# Altium PCB Tfinal.PcbDoc (part 1 of 3)
Units mm, origin at the board's own origin, x right, y up, seen from the top; angles counter-clockwise.
Board outline 152.4 x 101.6 mm, 2 copper layers (Top Layer, Bottom Layer); 134 components, 112 nets, 404 pads, 12 vias.
Unrouted connection lines stored in the file: 100.
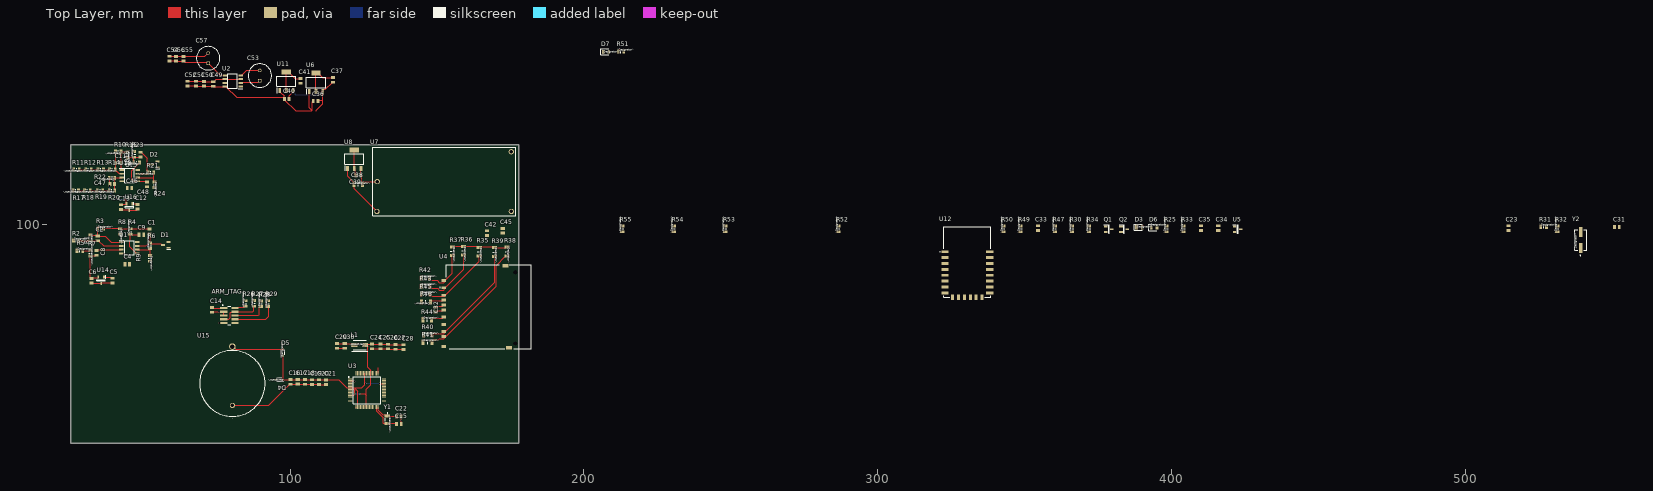
[diagram p0: Top Layer view]
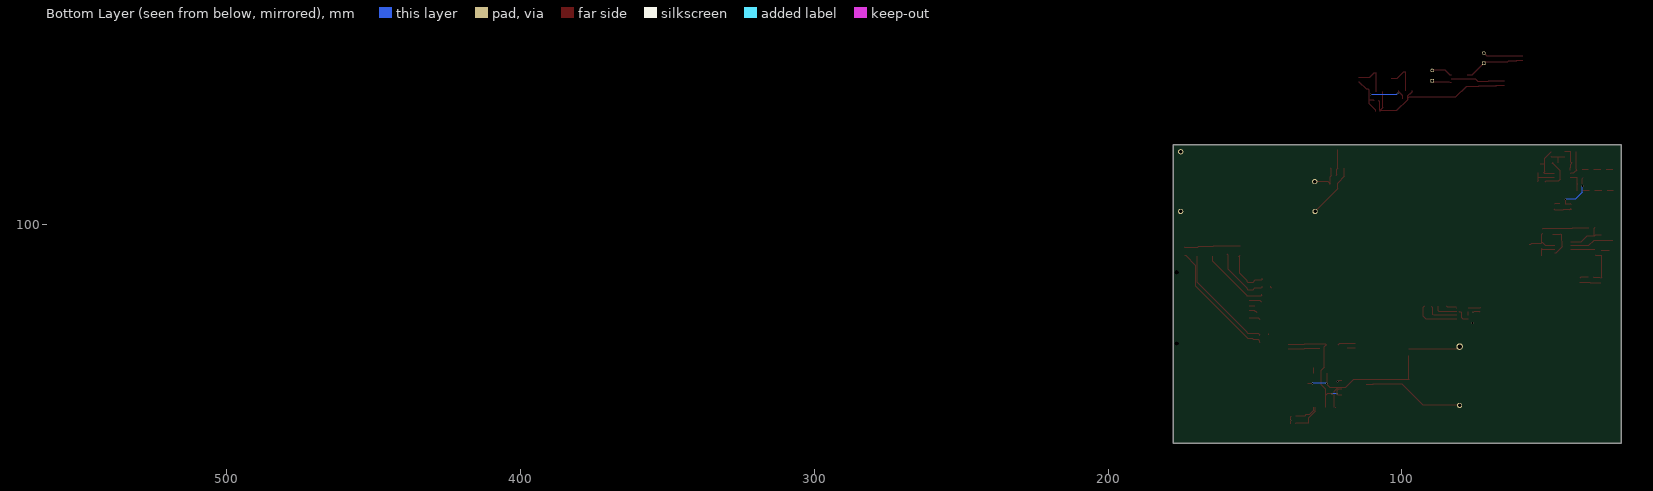
[diagram p1: Bottom Layer view, seen from below]

## Layer stack, top to bottom
Top Solder: solder mask 0.0102, Solder Resist, Dk 3.5
Top Layer: signal copper 0.0356
Dielectric 1: dielectric 0.32, FR-4, Dk 4.8
Bottom Layer: signal copper 0.0356
Bottom Solder: solder mask 0.0102, Solder Resist, Dk 3.5

## Board outline
25.4,25.4 177.8,25.4 177.8,127 25.4,127

## Design rules (kind name [scope] priority, off if disabled: settings)
Clearance [All] p1: gap=0.254 ignorepadtopadclearanceinfootprint=FALSE except(0: Arc-Hole Track-Hole SMDPad-Hole THPad-Hole Via-Hole Fill-Hole Poly-Hole Region-Hole Text-Hole)
PolygonConnect [All] p1: connectstyle=Relief reliefconductorwidth=0.254 reliefentries=4 polygonreliefangle="90 Angle" airgapwidth=0.254
RoutingVias [All] p1: holewidth=0.711 width=1.27 viastyle="Through Hole" minholewidth=0.711 minwidth=1.27 maxholewidth=0.711 maxwidth=1.27
SolderMaskExpansion [All] p1: expansion=0.102
Width [All] p1: maxlimit=0.254 minlimit=0.254 preferedwidth=0.254
30 further rules are at their usual default settings.

## Classes and differential pairs
component class adc_chanels.b: C1 C2 C4 C5 C6 C8 C9 C10 C11 C12 C13 C46 C47 C48 D1 D2 H3 R1 R2 R3 R4 R5 R6 R7 R8 R9 R10 R11 R12 R13 R14 R15 R16 R17 R18 R19 R20 R21 R22 R23 R24 U1 U13 U14 U16
component class supply: C36 C37 C38 C39 C40 C41 C49 C50 C51 C52 C53 C54 C55 C56 C57 D7 R51 U2 U6 U7 U8 U10 U11
component class arm: * ARM_JTAG C14 C15 C16 C17 C18 C19 C20 C21 C22 C23 C24 C25 C26 C27 C28 C29 C30 C31 C32 C33 C34 C35 C42 C45 D3 D4 D5 D6 H1 H2 L1 Q1 Q2 R25 R26 R27 R28 R29 R30 R31 R32 R33 R34 R35 R36 R37 R38 R39 R40 R41 R42 R43 R44 R45 R46 R47 R49 R50 R52 R53 R54 R55 U3 U4 U5 U12 U15 Y1 Y2

## Components (designator, comment, footprint, x,y, rotation, side; value= is the part's Value field where it differs from the comment)
ARM_JTAG "20021121-00010C4LF" "conector jtag ok" 79.395,68.885 r270 top
C1 "CAP_GRM2195C1H103FA01D_MURATA" "CAP smd 0805 ok" 49.606,97.356 r270 top
C2 "CAP_GRM2195C1H103FA01D_MURATA" "CAP smd 0805 ok" 31.953,94.999 r270 top
C4 "CAP_CC0805KRX7R8BB104_YAGEO" "CAP smd 0805 ok" 44.727,83.693 r0 top
C5 "CAP_CC0805KKX7R7BB105_YAGEO" "CAP smd 0805 ok" 42.189,80.902 r90 top
C6 "CAP_CC0805KKX7R7BB105_YAGEO" "CAP smd 0805 ok" 35.077,80.846 r90 top
C8 "CAP_GRM2195C1H103FA01D_MURATA" "CAP smd 0805 ok" 31.496,90.066 r270 top
C9 "CAP_GRM2195C1H103FA01D_MURATA" "CAP smd 0805 ok" 49.299,99.009 r180 top
C10 "CAP_GRM2195C1H103FA01D_MURATA" "CAP smd 0805 ok" 51.816,123.746 r90 top
C11 "CAP_GRM2195C1H103FA01D_MURATA" "CAP smd 0805 ok" 41.374,123.419 r180 top
C12 "CAP_CC0805KKX7R7BB105_YAGEO" "CAP smd 0805 ok" 50.775,106.017 r90 top
C13 "CAP_CC0805KKX7R7BB105_YAGEO" "CAP smd 0805 ok" 45.11,105.895 r90 top
C14 "CAP_CC0805KRX7R8BB104_YAGEO" "CAP smd 0805 ok" 70.79,70.66 r270 top
C15 "CAP_C0805X150J5GACTU_KEMET" "CAP smd 0805 ok" 137.183,29.388 r0 top
C16 "CAP_CL21A106KOCL3RC" "CAP smd 0805 ok" 97.561,46.169 r270 top
C17 "CAP_CL21A106KOCL3RC" "CAP smd 0805 ok" 99.974,46.189 r270 top
C18 "CAP_CC0805KRX7R8BB104_YAGEO" "CAP smd 0805 ok" 102.387,46.164 r270 top
C19 "CAP_CC0805KRX7R8BB104_YAGEO" "CAP smd 0805 ok" 104.8,46.087 r270 top
C20 "CAP_CC0805KRX7R8BB104_YAGEO" "CAP smd 0805 ok" 107.239,46.087 r270 top
C21 "CAP_CC0805KRX7R8BB104_YAGEO" "CAP smd 0805 ok" 109.55,46.037 r270 top
C22 "CAP_C0805X150J5GACTU_KEMET" "CAP smd 0805 ok" 137.112,31.928 r0 top
C23 "CAP_C0805X150J5GACTU_KEMET" "CAP smd 0805 ok" 517.121,98.755 r90 top
C24 "CAP_CL21A106KOCL3RC" "CAP smd 0805 ok" 125.298,58.234 r270 top
C25 "CAP_CC0805KRX7R8BB104_YAGEO" "CAP smd 0805 ok" 128.092,58.259 r270 top
C26 "CAP_CC0805KRX7R8BB104_YAGEO" "CAP smd 0805 ok" 130.658,58.208 r270 top
C27 "CAP_CC0805KRX7R8BB104_YAGEO" "CAP smd 0805 ok" 133.274,58.081 r270 top
C28 "CAP_CC0805KRX7R8BB104_YAGEO" "CAP smd 0805 ok" 135.992,58.005 r270 top
C29 "CAP_CC0805KRX7R8BB104_YAGEO" "CAP smd 0805 ok" 113.284,58.423 r270 top
C30 "CAP_CC0805KRX7R8BB104_YAGEO" "CAP smd 0805 ok" 115.976,58.392 r270 top
C31 "CAP_C0805X150J5GACTU_KEMET" "CAP smd 0805 ok" 551.538,96.342 r0 top
C32 "CAP_CC0805KRX7R8BB104_YAGEO" "CAP smd 0805 ok" 152.222,71.03 r90 top
C33 "CAP_CC0805KRX7R8BB104_YAGEO" "CAP smd 0805 ok" 357.101,98.755 r90 top
C34 "CAP_CC0805KKX7R7BB105_YAGEO" "CAP smd 0805 ok" 418.442,98.755 r90 top
C35 "CAP_CC0805KKX7R7BB105_YAGEO" "CAP smd 0805 ok" 412.6,98.755 r90 top
C36 "CAP_CL21A106KOCL3RC" "CAP smd 0805 ok" 108.557,144.551 r180 top
C37 "CAP_CL21A106KOCL3RC" "CAP smd 0805 ok" 112.039,148.918 r270 top
C38 "CAP_CL21A106KOCL3RC" "CAP smd 0805 ok" 123.416,113.843 r0 top
C39 "CAP_CL31A106MBHNNNE" "cap smd 1206 ok" 123.426,118.491 r0 top
C40 "CAP_CL21A106KOCL3RC" "CAP smd 0805 ok" 99.007,139.929 r0 top
C41 "CAP_CL21A106KOCL3RC" "CAP smd 0805 ok" 100.99,148.587 r270 top
C42 "CAP_CL21A106KOCL3RC" "CAP smd 0805 ok" 169.672,97.051 r90 top
C45 "CAP_CC0805KRX7R8BB104_YAGEO" "CAP smd 0805 ok" 175.006,97.869 r90 top
C46 "CAP_CC0805KRX7R8BB104_YAGEO" "CAP smd 0805 ok" 45.265,114.884 r180 top
C47 "CAP_GRM2195C1H103FA01D_MURATA" "CAP smd 0805 ok" 39.652,111.023 r0 top
C48 "CAP_GRM2195C1H103FA01D_MURATA" "CAP smd 0805 ok" 54.051,113.586 r90 top
C49 "CAP_CC0805KRX7R8BB104_YAGEO" "CAP smd 0805 ok" 76.53,147.775 r90 top
C50 "CAP_CC0805KRX7R8BB104_YAGEO" "CAP smd 0805 ok" 73.355,147.851 r90 top
C51 "CAP_CC0805KRX7R8BB104_YAGEO" "CAP smd 0805 ok" 70.663,147.932 r90 top
C52 "CAP_CC0805KRX7R8BB104_YAGEO" "CAP smd 0805 ok" 67.767,147.902 r90 top
C53 "CAP_ESY107M050AG3AA_KEMET" "cap elec 8x11.5 ok" 89.84,150.571 r90 top
C54 "CAP_CC0805KRX7R8BB104_YAGEO" "CAP smd 0805 ok" 61.62,156.436 r90 top
C55 "CAP_CC0805KRX7R8BB104_YAGEO" "CAP smd 0805 ok" 66.446,156.365 r90 top
C56 "CAP_CC0805KRX7R8BB104_YAGEO" "CAP smd 0805 ok" 63.779,156.385 r90 top
C57 "CAP_ESY107M050AG3AA_KEMET" "cap elec 8x11.5 ok" 72.263,156.489 r90 top
D1 "BAS40-04-TP" "diode shockit ok" 57.575,92.908 r180 top
D2 "BAS40-04-TP" "diode shockit ok" 53.823,120.32 r180 top
D3 "150080RS75000" "Diode smd 0805 red ok" 388.851,101.295 r0 top
D4 "DB2J20900L" "Diode SMini2 ok" 96.393,46.914 r180 top
D5 "DB2J20900L" "Diode SMini2 ok" 97.513,56.22 r90 top
D6 "150080VS75000" "Diode smd 0805 green ok" 393.931,101.168 r0 top
D7 "150080YS75000" "Diode smd 0805 yellow ok" 207.359,160.985 r0 top
L1 "CM453232-100KL" "Inductor smd 1812 ok" 123.804,54.762 r180 top
Q1 "MMBT2222ALT1G" "transistor led ok" 378.564,98.247 r0 top
Q2 "MMBT2222ALT1G" "transistor led ok" 383.771,98.247 r0 top
R1 "RC0805FR-074K7L" "res 0805 ok" 34.392,95.26 r270 top
R2 "RC0805FR-073K16L" "res 0805 ok" 27.32,96.545 r0 top
R3 "RC0805FR-079K31L" "res 0805 ok" 35.575,100.736 r0 top
R4 "RC0805FR-074K7L" "res 0805 ok" 43.434,97.47 r90 top
R5 "RC0805FR-073K16L" "res 0805 ok" 28.534,93.142 r0 top
R6 "RC0805FR-0710KL" "res 0805 ok" 50.165,92.644 r90 top
R7 "RC0805FR-074K7L" "res 0805 ok" 34.29,90.084 r270 top
R8 "RC0805FR-079K31L" "res 0805 ok" 44.425,97.419 r270 top
R9 "RC0805FR-0710KL" "res 0805 ok" 54.585,88.28 r270 top
R10 "RC0805FR-074K7L" "res 0805 ok" 41.57,122.377 r180 top
R11 "RC0805FR-07412KL" "res 0805 ok" 27.346,116.281 r180 top
R12 "RC0805FR-07412KL" "res 0805 ok" 31.405,116.281 r180 top
R13 "RC0805FR-07412KL" "res 0805 ok" 35.596,116.281 r180 top
R14 "RC0805FR-0715K8L" "res 0805 ok" 39.533,116.281 r180 top
R15 "RC0805FR-079K31L" "res 0805 ok" 46.888,123.607 r270 top
R16 "RC0805FR-074K7L" "res 0805 ok" 47.793,118.694 r180 top
R17 "RC0805FR-07412KL" "res 0805 ok" 27.087,109.169 r180 top
R18 "RC0805FR-07412KL" "res 0805 ok" 31.029,109.169 r180 top
R19 "RC0805FR-07412KL" "res 0805 ok" 35.342,109.169 r180 top
R20 "RC0805FR-0715K8L" "res 0805 ok" 39.406,109.169 r180 top
R21 "RC0805FR-0710KL" "res 0805 ok" 52.639,115.265 r180 top
R22 "RC0805FR-074K7L" "res 0805 ok" 39.411,113.487 r180 top
R23 "RC0805FR-079K31L" "res 0805 ok" 44.704,123.713 r90 top
R24 "RC0805FR-0710KL" "res 0805 ok" 56.159,113.375 r270 top
R25 "RC0805FR-07130RL" "res 0805 ok" 395.963,98.374 r90 top
R26 "AC0805JR-07100KL" "res 0805 ok" 82.55,72.989 r90 top
R27 "AC0805JR-07100KL" "res 0805 ok" 85.471,73.015 r90 top
R28 "AC0805JR-07100KL" "res 0805 ok" 87.833,72.888 r90 top
R29 "AC0805JR-07100KL" "res 0805 ok" 90.221,72.964 r90 top
R30 "RC0805JR-0710KL" "res 0805 ok" 363.832,98.374 r90 top
R31 "RC0805JR-0710KL" "res 0805 ok" 526.519,101.295 r0 top
R32 "RC0805JR-0710KL" "res 0805 ok" 528.932,98.374 r90 top
R33 "RC0805FR-07130RL" "res 0805 ok" 401.805,98.374 r90 top
R34 "RC0805JR-0710KL" "res 0805 ok" 369.674,98.374 r90 top
R35 "RC1206JR-0768KL" "Res 1206 ok" 167.157,90.476 r270 top
R36 "RC1206JR-0768KL" "Res 1206 ok" 161.823,90.846 r270 top
R37 "RC1206JR-0768KL" "Res 1206 ok" 158.022,90.682 r270 top
R38 "RC1206JR-0768KL" "Res 1206 ok" 176.606,90.564 r270 top
R39 "RC1206JR-0768KL" "Res 1206 ok" 172.39,90.386 r270 top
R40 "RC1206JR-07100RL" "Res 1206 ok" 146.94,65.064 r0 top
R41 "RC1206JR-07100RL" "Res 1206 ok" 146.89,62.575 r0 top
R42 "RC1206JR-07100RL" "Res 1206 ok" 146.099,84.368 r0 top
R43 "RC1206JR-07100RL" "Res 1206 ok" 146.176,81.625 r0 top
R44 "RC1206JR-07100RL" "Res 1206 ok" 146.76,70.195 r0 top
R45 "RC1206JR-07100RL" "Res 1206 ok" 146.226,78.907 r0 top
R46 "RC1206JR-07100RL" "Res 1206 ok" 146.178,70.677 r180 top
R47 "AC0805JR-07100KL" "res 0805 ok" 357.99,98.374 r90 top
R49 "RC0805JR-0722RL" "res 0805 ok" 346.306,98.374 r90 top
R50 "RC0805JR-0722RL" "res 0805 ok" 340.464,98.374 r90 top
R51 "RC0805FR-07130RL" "res 0805 ok" 212.608,160.884 r0 top
R52 "RC0805JR-0710KL" "res 0805 ok" 284.33,98.374 r90 top
R53 "RC0805JR-0710KL" "res 0805 ok" 245.849,98.374 r90 top
R54 "RC0805JR-0710KL" "res 0805 ok" 228.323,98.374 r90 top
R55 "RC0805JR-0710KL" "res 0805 ok" 210.797,98.374 r90 top
U1 "TLV2472CDR" "tlv2472 ok" 40.392,90.018 r0 top
U2 "LM2660MX/NOPB" "LM2660MX/NOPB ok" 80.467,148.666 r180 top
U3 "ATSAM4S8BA-AU" "arm ok" 126.236,43.478 r0 top
U4 "10067847-001RLF" "conector sd ok" 166.954,71.846 r90 top
U5 "ISL21010CFH330Z-TK" "3v reference ok" 422.252,98.12 r0 top
U6 "LM1117MP-3.3" "LM1117MP-3.3 ok" 108.821,148.198 r90 top
U7 "VOF-10B-S12" "CONV_VOF-10B-S12 ok" 152.434,114.441 r180 top
U8 "" "LM1117MP-5.0/NOPB ok" 121.742,122.987 r90 top
U11 "LM1117MP-3.3" "LM1117MP-3.3 ok" 98.781,148.565 r90 top
U12 "esp8266 12f" "modulo wifi ok" 330.431,87.071 r0 top
U13 "TLV2472CDR" "tlv2472 ok" 40.468,114.554 r0 top
U14 "ISL21080CIH315Z-TK" "iso 1.5v ok" 35.738,80.874 r270 top
U15 "BS-7" "pila ok" 80.391,45.669 r90 top
U16 "ISL21080CIH315Z-TK" "iso 1.5v ok" 45.339,105.791 r270 top
Y1 "ECS-.327-12.5-34S-TR" "clk 32k ok" 129.845,33.421 r270 top
Y2 "ECS-120-20-3X-TR" "clk 12M ok" 533.25,94.056 r90 top

## Footprints (in the part's own frame and the unit in brackets; to place one, negate y for a bottom-side part, rotate by r counter-clockwise, add the part's x,y. Pads: shape width x height; smd on the part's side, far side on the other; paste and mask are expansions set on the pad)
"3v reference ok" [mm]
  rect 1.1x0.6 smd: 1(-0.973,1.077) 2(-0.973,-0.823) 3(1.227,0.127)
  silkscreen extent -1.52,-1.33 0.33,1.63, body extent -1.06,-1.33 1.31,1.59, height 0.94
"arm ok" [mm]
  rect 1.475x0.3 smd: 1(-5.738,3.75) 2(-5.738,3.25) 3(-5.738,2.75) 4(-5.738,2.25) 5(-5.738,1.75) 6(-5.738,1.25) 7(-5.738,0.75) 8(-5.738,0.25) 9(-5.738,-0.25) 10(-5.738,-0.75) 11(-5.738,-1.25) 12(-5.738,-1.75) 13(-5.738,-2.25) 14(-5.738,-2.75) 15(-5.738,-3.25) 16(-5.738,-3.75) 33(5.738,-3.75) 34(5.738,-3.25) 35(5.738,-2.75) 36(5.738,-2.25) 37(5.738,-1.75) 38(5.738,-1.25) 39(5.738,-0.75) 40(5.738,-0.25) 41(5.738,0.25) 42(5.738,0.75) 43(5.738,1.25) 44(5.738,1.75) 45(5.738,2.25) 46(5.738,2.75) 47(5.738,3.25) 48(5.738,3.75)
  rect 0.3x1.475 smd: 17(-3.75,-5.738) 18(-3.25,-5.738) 19(-2.75,-5.738) 20(-2.25,-5.738) 21(-1.75,-5.738) 22(-1.25,-5.738) 23(-0.75,-5.738) 24(-0.25,-5.738) 25(0.25,-5.738) 26(0.75,-5.738) 27(1.25,-5.738) 28(1.75,-5.738) 29(2.25,-5.738) 30(2.75,-5.738) 31(3.25,-5.738) 32(3.75,-5.738) 49(3.75,5.738) 50(3.25,5.738) 51(2.75,5.738) 52(2.25,5.738) 53(1.75,5.738) 54(1.25,5.738) 55(0.75,5.738) 56(0.25,5.738) 57(-0.25,5.738) 58(-0.75,5.738) 59(-1.25,5.738) 60(-1.75,5.738) 61(-2.25,5.738) 62(-2.75,5.738) 63(-3.25,5.738) 64(-3.75,5.738)
  silkscreen extent -6.35,-4.65 4.65,4.65, body extent -6,-6 6,6, height 1.6
"cap elec 8x11.5 ok" [mm]
  rect 1.2x1.2 hole 0.8: 1(-1.829,0.102)
  round 1.2 hole 0.8: 2(1.671,0.102)
  silkscreen extent -4.08,-3.9 3.92,4.1, body extent -4.33,-4.15 4.17,4.35, height 12.5
"CAP smd 0805 ok" [mm]
  rect 0.96x1.39 smd: 1(-0.917,2.642) 2(0.663,2.642)
  body extent -1.13,2.02 0.87,3.27, height 0.95
"cap smd 1206 ok" [mm]
  rect 1.05x1.82 smd: 1(-1.593,-4.928) 2(1.187,-4.928)
  silkscreen extent -0.2,-5.63 -0.2,-4.23, body extent -1.8,-5.73 1.4,-4.13, height 1.8
"clk 12M ok" [mm]
  rect 3.5x1.2 smd: 1(-2.231,-5.842) 2(3.269,-5.842)
  silkscreen extent -4.78,-7.89 4.02,-3.79, body extent -3.29,-7.78 4.31,-3.68, height 2.31
"clk 32k ok" [mm]
  rect 1.1x1.9 smd: 1(-1.25,3.302) 2(1.25,3.302)
  silkscreen extent -2.3,2.55 0.5,4.05, body extent -1.6,2.55 1.6,4.05, height 0.92
"conector jtag ok" [mm]
  rect 0.76x2.4 smd: 1(-2.54,-1.95) 2(-2.54,1.95) 3(-1.27,-1.95) 4(-1.27,1.95) 5(0,-1.95) 6(0,1.95) 7(1.27,-1.95) 8(1.27,1.95) 9(2.54,-1.95) 10(2.54,1.95)
  silkscreen extent -3.6,-2.4 3.17,0.5, body extent -3.2,-2.75 3.15,2.75, height 4.55
"conector sd ok" [mm]
  rect 1x1.5 smd: 1(6.475,14.652) 2(3.925,14.652) 3(0.675,14.652) 4(-1.025,14.652) 5(-3.525,14.652) 6(-6.025,14.652) 7(-8.45,14.652) 8(-10.15,14.652) 9(8.975,14.652) CD1(2.275,14.652) WP1(-13.5,14.652)
  rect 1.2x2.2 smd: G1(14,-6.348) G2(-14,-7.548)
  round 0.75 hole 1.5 unplated: MH1(-12.5,-9.648) MH2(11.7,-9.648)
  silkscreen extent -14.25,-15.15 14.25,16.03, body extent -14.23,-15 14.23,15.25, height 2.9
"CONV_VOF-10B-S12 ok" [mm]
  round 1.8 hole 1.2: 1(-22.86,10.16) 2(-22.86,-10.16) 3(22.86,10.16) 4(22.76,0)
  silkscreen extent -24.3,-11.65 24.3,11.65, body extent -24.38,-11.81 24.22,11.49, height 19.21
"diode shockit ok" [mm]
  rect 1.35x0.65 smd: 1(-1.15,0.985) 2(-1.15,-0.935) 3(0.85,0.025)
  silkscreen extent -1.83,1.56 -0.48,1.56, body extent -1.32,-1.43 1.08,1.47, height 1.01
"Diode smd 0805 green ok" [mm]
  rect 0.9x1.4 smd: 1(-0.9,-2.35) 2(1,-2.35)
  silkscreen extent -1.7,-3.4 1,-1.3, body extent -1,-2.95 1,-1.7, height 1.11
"Diode smd 0805 red ok" [mm]
  rect 0.9x1.4 smd: 1(-0.875,-2.4) 2(1.025,-2.4)
  silkscreen extent -1.67,-3.45 1.03,-1.35, body extent -0.95,-2.97 1.05,-1.73, height 1.11
"Diode smd 0805 yellow ok" [mm]
  rect 0.9x1.4 smd: 1(-0.85,-2.4) 2(1.05,-2.4)
  silkscreen extent -1.65,-3.45 1.05,-1.35
"Diode SMini2 ok" [mm]
  rect 0.99x0.47 smd: 1(-0.975,-0.15) 2(1.175,-0.15)
  silkscreen extent -1.47,-0.77 0.95,0.48, body extent -1.15,-0.77 1.35,0.48, height 0.8
"Inductor smd 1812 ok" [mm]
  rect 2.15x1.25 smd: 1(-1.723,-4.064) 2(1.977,-4.064)
  silkscreen extent -2.67,-5.66 2.79,-2.03, body extent -2.12,-5.66 2.38,-2.46, height 3.4
"iso 1.5v ok" [mm]
  rect 1.1x0.6 smd: 1(-1.1,0.95) 2(-1.1,-0.95) 3(1.1,0)
  silkscreen extent -1.65,-1.46 0.2,1.5, body extent -1.18,-1.46 1.18,1.46, height 1.12
"LM1117MP-3.3 ok" [mm]
  rect 1.75x0.95 smd: 1(-3.15,2.3) 2(-3.15,0) 3(-3.15,-2.3)
  rect 1.75x3.2 smd: 4(3.15,0)
  silkscreen extent -4.03,-3.25 1.75,3.25, body extent -3.5,-3.25 3.5,3.25, height 1.68
"LM1117MP-5.0/NOPB ok" [mm]
  rect 1.75x0.95 smd: 1(-4.039,2.173) 2(-4.039,-0.127) 3(-4.039,-2.427)
  rect 1.75x3.2 smd: 4(2.261,-0.127)
  silkscreen extent -4.91,-3.38 0.86,3.12, body extent -4.39,-3.38 2.61,3.12, height 1.68
"LM2660MX/NOPB ok" [mm]
  rect 1.528x0.65 smd: 1(-2.711,1.905) 2(-2.711,0.635) 3(-2.711,-0.635) 4(-2.711,-1.905) 5(2.711,-1.905) 6(2.711,-0.635) 7(2.711,0.635) 8(2.711,1.905)
  silkscreen extent -3.47,-2.45 1.6,2.58, body extent -3.01,-2.45 3.01,2.45, height 1.63
"modulo wifi ok" [mm]
  rect 2.5x1 smd: 1(-7.6,3.5) 2(-7.6,1.5) 3(-7.6,-0.5) 4(-7.6,-2.5) 5(-7.6,-4.5) 6(-7.6,-6.5) 7(-7.6,-8.5) 8(-7.6,-10.5) 15(7.6,-10.5) 16(7.6,-8.5) 17(7.6,-6.5) 18(7.6,-4.5) 19(7.6,-2.5) 20(7.6,-0.5) 21(7.6,1.5) 22(7.6,3.5)
  rect 1x1.8 smd: 9(-5,-12) 10(-3,-12) 11(-1,-12) 12(1,-12) 13(3,-12) 14(5,-12)
  silkscreen extent -9.4,-12 8,12, body extent -8,-12 8,12, height 3.1
"pila ok" [mm]
  round 1.755 hole 1.17: 1(-7.366,0)
  round 2.25 hole 1.5: 2(12.634,0)
  silkscreen extent -11.77,-11.17 11.27,11.17, body extent -11.08,-11.17 13.32,11.17, height 9.1
"res 0805 ok" [mm]
  rect 0.95x1.4 smd: 1(-0.975,-2.21) 2(0.925,-2.21)
  silkscreen extent -0.03,-2.73 -0.03,-1.68, body extent -1.03,-2.83 0.97,-1.58, height 0.6
"Res 1206 ok" [mm]
  rect 1x1.75 smd: 1(-1.576,-2.769) 2(1.424,-2.769)
  silkscreen extent -0.08,-3.47 -0.08,-2.07, body extent -1.63,-3.57 1.47,-1.97, height 0.65
"tlv2472 ok" [mm]
  rect 1.525x0.65 smd: 1(2.241,3.81) 2(2.241,2.54) 3(2.241,1.27) 4(2.241,0) 5(7.665,0) 6(7.665,1.27) 7(7.665,2.54) 8(7.665,3.81)
  silkscreen extent 1.48,-0.55 6.55,4.48, body extent 1.95,-0.55 7.95,4.36, height 1.75
"transistor led ok" [mm]
  rect 1.25x0.6 smd: 1(-1.05,0.955) 2(-1.05,-0.955) 3(1.05,0)
  silkscreen extent -1.68,-1.46 0.08,1.51, body extent -1.18,-1.46 1.18,1.46, height 1.11

## Part data
ARM_JTAG: "Conn Unshrouded Header HDR 10 POS 1.27mm Solder ST Top Entry SMD Minitek127® T/R", Manufacturer 1="Amphenol ICC / FCI", Supplier Part Number 1=609-3695-1-ND, ComponentLink1Description=https://datasheet.ciiva.com/11749/0900766b8118d62a-11749057.pdf?src-supplier=RSComponents, ComponentLink1URL=https://datasheet.ciiva.com/11749/0900766b8118d62a-11749057.pdf?src-supplier=RSComponents, Manufacturer Part Number 1=20021121-00010C4LF, Pricing 1="1=0,91000, 10=0,76900, 100=0,69070 (USD)", RoHS=No, Stock 1=0, Supplier 1=Digi-Key
C1 C2 C8 C9 C10 C11 C47 C48: "0805 10 nF 50 V ±1% Tolerance C0G SMD Multilayer Ceramic Capacitor", Capacitance=10nF, Case/Package=0805, Case Code (Metric)=2012, Dielectric=C0G, Manufacturer 1=Murata, Manufacturer Part Number 1=GRM2195C1H103FA01D, Max Operating Temperature=125°C, Min Operating Temperature=-55°C, Package Quantity=4000, Temperature Coefficient=30ppm/°C, Tolerance=1%, Voltage=50V, Case Code (Imperial)=0805, ComponentLink1Description=https://datasheet.ciiva.com/29542/partnumbering-e-01-29542571.pdf?src-supplier=Digi-Key, ComponentLink1URL=https://datasheet.ciiva.com/29542/partnumbering-e-01-29542571.pdf?src-supplier=Digi-Key, ComponentLink2Description=https://datasheet.ciiva.com/29542/partnumbering-e-01-29542569.pdf?src-supplier=Digi-Key, ComponentLink2URL=https://datasheet.ciiva.com/29542/partnumbering-e-01-29542569.pdf?src-supplier=Digi-Key, ComponentLink3Description=https://datasheet.ciiva.com/29542/partnumbering-e-01-29542570.pdf?src-supplier=Digi-Key, ComponentLink3URL=https://datasheet.ciiva.com/29542/partnumbering-e-01-29542570.pdf?src-supplier=Digi-Key, ComponentLink4Description=https://datasheet.ciiva.com/17452/c02e-17452856.pdf?src-supplier=Avnet+Europe, ComponentLink4URL=https://datasheet.ciiva.com/17452/c02e-17452856.pdf?src-supplier=Avnet+Europe, ComponentLink5Description=https://datasheet.ciiva.com/16497/c02e-16497047.pdf?src-supplier=Future+Electronics, ComponentLink5URL=https://datasheet.ciiva.com/16497/c02e-16497047.pdf?src-supplier=Future+Electronics, Construction=Flat, Depth=1.25mm, Height=0.85mm, Lead Free="Lead Free", Length=2mm, Mount="Surface Mount", Packaging="Tape and Reel", Pricing 1="1=0,54310 (USD)", Radiation Hardening=No, REACH SVHC="No SVHC", RoHS=Yes, RoHS Compliant=Yes, Series=GRM, Stock 1=3, Supplier 1="Arrow Electronics", Supplier Part Number 1=GRM2195C1H103FA01D, Termination=SMD/SMT, Thickness=0.037inch, Voltage Rating=50V, Voltage Rating (DC)=50V, Width=1.25mm
C4 C14 C18 C19 C20 C21 C25 C26 C27 C28 C29 C30 C32 C33 C45 C46 C49 C50 C51 C52 C54 C55 C56: "CAPACITOR, 0805, 100NF, 25V, REEL 4000", Capacitance=0.1uF, Case/Package=0805, Case Code (Metric)=2012, Dielectric=X7R, Insulation Resistance=100GR, Manufacturer 1=Yageo, Manufacturer Part Number 1=CC0805KRX7R8BB104, Max Operating Temperature=125°C, Min Operating Temperature=-55°C, Package Quantity=1, Resistor Type=Ceramic, Supplier Part Number 1=311-1141-1-ND, Tolerance=10%, Voltage Rating=25V, Case Code (Imperial)=0805, ComponentLink1Description=https://datasheet.ciiva.com/8034/70765-8034031.pdf?src-supplier=Element14, ComponentLink1URL=https://datasheet.ciiva.com/8034/70765-8034031.pdf?src-supplier=Element14, ComponentLink2Description=https://datasheet.ciiva.com/28450/1489800-28450789.pdf?src-supplier=Element14, ComponentLink2URL=https://datasheet.ciiva.com/28450/1489800-28450789.pdf?src-supplier=Element14, ComponentLink3Description=https://datasheet.ciiva.com/46430/1850775-46430166.pdf?src-supplier=Element14, ComponentLink3URL=https://datasheet.ciiva.com/46430/1850775-46430166.pdf?src-supplier=Element14, ComponentLink4Description=https://datasheet.ciiva.com/145/mlccorderingcode-145008.pdf?src-supplier=Digi-Key, ComponentLink4URL=https://datasheet.ciiva.com/145/mlccorderingcode-145008.pdf?src-supplier=Digi-Key, ComponentLink5Description=https://datasheet.ciiva.com/145/mlccorderingcode-145007.pdf?src-supplier=Digi-Key, ComponentLink5URL=https://datasheet.ciiva.com/145/mlccorderingcode-145007.pdf?src-supplier=Digi-Key, ComponentLink6Description=https://datasheet.ciiva.com/145/mlccorderingcode-145009.pdf?src-supplier=Digi-Key, ComponentLink6URL=https://datasheet.ciiva.com/145/mlccorderingcode-145009.pdf?src-supplier=Digi-Key, ComponentLink7Description=https://datasheet.ciiva.com/8034/1784427-8034030.pdf?src-supplier=Element14, ComponentLink7URL=https://datasheet.ciiva.com/8034/1784427-8034030.pdf?src-supplier=Element14, ComponentLink8Description=https://datasheet.ciiva.com/8034/1784427-8034029.pdf?src-supplier=Element14, ComponentLink8URL=https://datasheet.ciiva.com/8034/1784427-8034029.pdf?src-supplier=Element14, ComponentLink9Description=https://datasheet.ciiva.com/15189/getdatasheetpartid-330244-15189223.pdf?src-supplier=Verical, ComponentLink9URL=https://datasheet.ciiva.com/15189/getdatasheetpartid-330244-15189223.pdf?src-supplier=Verical, ComponentLink10Description=https://datasheet.ciiva.com/16625/upy-gphc-x7r-6-3v-to-50v-8-16625546.pdf?src-supplier=Avnet+Europe, ComponentLink10URL=https://datasheet.ciiva.com/16625/upy-gphc-x7r-6-3v-to-50v-8-16625546.pdf?src-supplier=Avnet+Europe, Depth=1.25mm, Halogen Free="Halogen Free", Height=0.85mm, Lead Free="Lead Free", Length=2mm, Material=Ceramic, Mount="Surface Mount", Number of Pins=2, Packaging="Tape and Reel", Pricing 1="1=0,12000, 10=0,08800, 50=0,04980, 100=0,04130, 500=0,02894, 1000=0,02396 (USD)", Radiation Hardening=No, REACH SVHC="No SVHC", RoHS=Yes, RoHS Compliant=Yes, Series=CC, Stock 1=278639, Supplier 1=Digi-Key, Termination=SMD/SMT, Thickness=0.033inch, Voltage Rating (DC)=25V, Width=0.049inch
C5 C6 C12 C13 C34 C35: "YAGEO   CC0805KKX7R7BB105   CERAMIC CAPACITOR, 1UF, 16V, X7R, 10%, 0805", Capacitance=1uF, Case/Package=0805, Case Code (Metric)=2012, Dielectric=X7R, Manufacturer 1=Yageo, Manufacturer Part Number 1=CC0805KKX7R7BB105, Max Operating Temperature=125°C, Min Operating Temperature=-55°C, Package Quantity=1, Supplier Part Number 1=311-1365-1-ND, Tolerance=10%, Voltage Rating=16V, Case Code (Imperial)=0805, ComponentLink1Description=https://datasheet.ciiva.com/144/mlccorderingcode-144902.pdf?src-supplier=Digi-Key, ComponentLink1URL=https://datasheet.ciiva.com/144/mlccorderingcode-144902.pdf?src-supplier=Digi-Key, ComponentLink2Description=https://datasheet.ciiva.com/144/mlccorderingcode-144903.pdf?src-supplier=Digi-Key, ComponentLink2URL=https://datasheet.ciiva.com/144/mlccorderingcode-144903.pdf?src-supplier=Digi-Key, ComponentLink3Description=https://datasheet.ciiva.com/144/mlccorderingcode-144904.pdf?src-supplier=Digi-Key, ComponentLink3URL=https://datasheet.ciiva.com/144/mlccorderingcode-144904.pdf?src-supplier=Digi-Key, ComponentLink4Description=https://datasheet.ciiva.com/11464/upy-gphc-x7r-6-3v-to-50v-8-11464750.pdf?src-supplier=Avnet, ComponentLink4URL=https://datasheet.ciiva.com/11464/upy-gphc-x7r-6-3v-to-50v-8-11464750.pdf?src-supplier=Avnet, ComponentLink5Description=https://datasheet.ciiva.com/13173/upy-gp-np0-16v-to-50v-8-3714-13173254.pdf?src-supplier=Mouser, ComponentLink5URL=https://datasheet.ciiva.com/13173/upy-gp-np0-16v-to-50v-8-3714-13173254.pdf?src-supplier=Mouser, ComponentLink6Description=https://datasheet.ciiva.com/7978/1489800-7978201.pdf?src-supplier=Element14, ComponentLink6URL=https://datasheet.ciiva.com/7978/1489800-7978201.pdf?src-supplier=Element14, ComponentLink7Description=https://datasheet.ciiva.com/28450/1489800-28450750.pdf?src-supplier=Element14, ComponentLink7URL=https://datasheet.ciiva.com/28450/1489800-28450750.pdf?src-supplier=Element14, ComponentLink8Description=https://datasheet.ciiva.com/15189/getdatasheetpartid-251802-15189206.pdf?src-supplier=Verical, ComponentLink8URL=https://datasheet.ciiva.com/15189/getdatasheetpartid-251802-15189206.pdf?src-supplier=Verical, Depth=1.25mm, Halogen Free="Halogen Free", Lead Free="Lead Free", Length=2mm, Mount="Surface Mount", Packaging="Tape and Reel", Pricing 1="1=0,16000, 10=0,11700, 50=0,06640, 100=0,05500, 500=0,03858, 1000=0,03194 (USD)", Radiation Hardening=No, REACH SVHC="No SVHC", RoHS=Yes, RoHS Compliant=Yes, Series=CC, Stock 1=516899, Supplier 1=Digi-Key, Termination=SMD/SMT, Thickness=0.049inch, Voltage Rating (DC)=16V, Width=0.049inch
C15 C22 C23 C31: "Multilayer Ceramic Capacitors MLCC - SMD/SMT 50volts 15pF 5% C0G", Capacitance=15pF, Case/Package=0805, Case Code (Metric)=2012, Dielectric=C0G, Dielectric Material=Ceramic, Manufacturer 1=KEMET, Manufacturer Part Number 1=C0805X150J5GACTU, Max Operating Temperature=125°C, Min Operating Temperature=-55°C, Package Quantity=4000, Supplier Part Number 1=399-7428-1-ND, Tolerance=5%, Voltage Rating=50V, Case Code (Imperial)=0805, ComponentLink1Description=http://www.mouser.com/ds/2/212/KEM_C1062_C0G_FT-CAP_SMD-1101746.pdf?src-supplier=Mouser, ComponentLink1URL=http://www.mouser.com/ds/2/212/KEM_C1062_C0G_FT-CAP_SMD-1101746.pdf?src-supplier=Mouser, ComponentLink2Description=http://www.kemet.com/kemet/web/homepage/kechome.nsf/file/KEM_C1062_C0G_FT-CAP_SMD.pdf/$file/KEM_C1062_C0G_FT-CAP_SMD.pdf?src-supplier=Avnet, ComponentLink2URL=http://www.kemet.com/kemet/web/homepage/kechome.nsf/file/KEM_C1062_C0G_FT-CAP_SMD.pdf/$file/KEM_C1062_C0G_FT-CAP_SMD.pdf?src-supplier=Avnet, ComponentLink3Description=https://search.kemet.com/component-edge/download/specsheet/C0805X150J5GACTU.pdf?src-supplier=Digi-Key, ComponentLink3URL=https://search.kemet.com/component-edge/download/specsheet/C0805X150J5GACTU.pdf?src-supplier=Digi-Key, Construction=Flat, Depth=1.25mm, Features="Soft Termination", Height=0.78mm, Lead Free="Lead Free", Length=0.083inch, Mount="Surface Mount", Packaging="Tape and Reel", Pricing 1="1=0,33000, 10=0,23100, 50=0,16160, 100=0,13860, 500=0,10396, 1000=0,08778 (USD)", Radiation Hardening=No, RoHS=Yes, RoHS Compliant=Yes, Series=FT-CAP, Stock 1=2348, Supplier 1=Digi-Key, Termination=SMD/SMT, Thickness=0.035inch, Voltage Rating (DC)=50V, Width=1.25mm
C16 C17 C24 C36 C37 C38 C40 C41 C42: "CAP CER 10UF 16V X5R 0805", Capacitance=10uF, Case/Package=0805, Case Code (Metric)=2012, Manufacturer 1=Samsung, Manufacturer Part Number 1=CL21A106KOCL3RC, Max Operating Temperature=85°C, Min Operating Temperature=-55°C, Package Quantity=1, Supplier Part Number 1=1276-2398-2-ND, Tolerance=10%, Voltage Rating=16V, Case Code (Imperial)=0805, ComponentLink1Description=https://datasheet.ciiva.com/25796/cl21a106kocl3rc-25796224.pdf?src-supplier=Digi-Key, ComponentLink1URL=https://datasheet.ciiva.com/25796/cl21a106kocl3rc-25796224.pdf?src-supplier=Digi-Key, Length=0.079inch, Mount="Surface Mount", Packaging="Tape and Reel", RoHS=Yes, RoHS Compliant=Yes, Series=CL, Stock 1=0, Supplier 1=Digi-Key, Thickness=0.037inch, Width=0.049inch
C39: "Cap Ceramic 10uF 50V X5R 20% Pad SMD 1206 85°C T/R", Capacitance=10uF, Case/Package=1206, Case Code (Metric)=3216, Dielectric=X5R, Manufacturer 1=Samsung, Manufacturer Part Number 1=CL31A106MBHNNNE, Max Operating Temperature=85°C, Min Operating Temperature=-55°C, Supplier Part Number 1=1276-6736-1-ND, Tolerance=20%, Voltage Rating=50V, Case Code (Imperial)=1206, ComponentLink1Description=http://www.samsungsem.com/kr/support/product-search/mlcc/CL31A106MBHNNNE.jsp?src-supplier=Digi-Key, ComponentLink1URL=http://www.samsungsem.com/kr/support/product-search/mlcc/CL31A106MBHNNNE.jsp?src-supplier=Digi-Key, Length=0.126inch, Mount="Surface Mount", Packaging="Tape and Reel", Pricing 1="1=0,31000, 10=0,21300, 50=0,14200, 100=0,12070, 500=0,08520, 1000=0,07455 (USD)", RoHS=Yes, RoHS Compliant=Yes, Stock 1=1423422, Supplier 1=Digi-Key, Thickness=0.071inch, Voltage Rating (DC)=50V, Width=0.063inch
C53 C57: "KEMET - ESY107M050AG3AA - Elektrolytkondensator, 100 µF, 50 V, Produktreihe ESY, ± 20%, Radial bedrahtet, 8 mm", Capacitance=100uF, Case/Package=Radial, Dielectric Material=Aluminium, ESR (Equivalent Series Resistance)=74mR, Leakage Current=50uA, Manufacturer 1=KEMET, Manufacturer Part Number 1=ESY107M050AG3AA, Max Operating Temperature=105°C, Min Operating Temperature=-40°C, Package Quantity=6000, Ripple Current=511mA, Supplier Part Number 1=399-6119-ND, Tolerance=20%, Voltage=50V, ComponentLink1Description=http://www.farnell.com/datasheets/2751412.pdf?src-supplier=Farnell, ComponentLink1URL=http://www.farnell.com/datasheets/2751412.pdf?src-supplier=Farnell, ComponentLink2Description=http://www.mouser.com/ds/2/212/KEM_A4007_ESY-1103537.pdf?src-supplier=Mouser, ComponentLink2URL=http://www.mouser.com/ds/2/212/KEM_A4007_ESY-1103537.pdf?src-supplier=Mouser, ComponentLink3Description=http://components.arrow.com/part/dataview/0323_06946698?src-supplier=Arrow+Europe, ComponentLink3URL=http://components.arrow.com/part/dataview/0323_06946698?src-supplier=Arrow+Europe, ComponentLink4Description=https://www.alliedelec.com/m/d/2f7883d23207e2a46fd2b27bea013c02.pdf?src-supplier=Allied+Electronics, ComponentLink4URL=https://www.alliedelec.com/m/d/2f7883d23207e2a46fd2b27bea013c02.pdf?src-supplier=Allied+Electronics, ComponentLink5Description=http://uk.rs-online.com/webdocs/13da/0900766b813da6ab.pdf?src-supplier=RSComponents, ComponentLink5URL=http://uk.rs-online.com/webdocs/13da/0900766b813da6ab.pdf?src-supplier=RSComponents, ComponentLink6Description=https://api.kemet.com/component-edge/download/specsheet/ESY107M050AG3AA.pdf?src-supplier=Digi-Key, ComponentLink6URL=https://api.kemet.com/component-edge/download/specsheet/ESY107M050AG3AA.pdf?src-supplier=Digi-Key, ComponentLink7Description=http://capacitoredge.kemet.com/capedge2/DataSheet?pn=ESY107M050AG3AA&src-supplier=Avnet, ComponentLink7URL=http://capacitoredge.kemet.com/capedge2/DataSheet?pn=ESY107M050AG3AA&src-supplier=Avnet, ComponentLink8Description=http://capacitoredge.kemet.com/capedge2/DataSheet/Datasheet-ESY107M050AG3AA.pdf?pn=ESY107M050AG3AA&src-supplier=Onlinecomponents.com, ComponentLink8URL=http://capacitoredge.kemet.com/capedge2/DataSheet/Datasheet-ESY107M050AG3AA.pdf?pn=ESY107M050AG3AA&src-supplier=Onlinecomponents.com, ComponentLink9Description=http://capacitoredge.kemet.com/capedge2/DataSheet?pn=ESY107M050AG3AA&src-supplier=Avnet+Europe, ComponentLink9URL=http://capacitoredge.kemet.com/capedge2/DataSheet?pn=ESY107M050AG3AA&src-supplier=Avnet+Europe, ComponentLink10Description=http://www.farnell.com/datasheets/2751412.pdf?src-supplier=Newark, ComponentLink10URL=http://www.farnell.com/datasheets/2751412.pdf?src-supplier=Newark, Diameter=8mm, Dissipation Factor=0.1%, Height=11mm, Height - Seated (Max)=0.492inch, Impedance=74mR, Lead/Base Style=Straight, Lead Diameter=0.6mm, Lead Length=20mm, Lead Pitch=3.5mm, Length=11mm, Life (Hours)=3000Hour, Mount="Through Hole,PCB", Packaging=Bulk, Pricing 1="1=0,44000, 10=0,30700, 50=0,21500, 100=0,18420, 500=0,13818, 1000=0,11668, 2500=0,11054, 5000=0,10440 (USD)", Radiation Hardening=No, RoHS=Yes, RoHS Compliant=Yes, Series=ESY, Stock 1=587, Supplier 1=Digi-Key, Termination=Radial, Voltage Rating=50V, Voltage Rating (DC)=50V
D1 D2: "DIODE ARRAY SCHOTTKY 40V SOT23", Average Rectified Current=200mA, Capacitance=5pF, Case/Package=SOT-23, Forward Voltage=1V, Manufacturer 1=MCC, Max Forward Surge Current (Ifsm)=600mA, Max Operating Temperature=125°C, Max Repetitive Reverse Voltage (Vrrm)=40V, Max Reverse Current=200nA, Min Operating Temperature=-55°C, Package Quantity=3000, Power Dissipation=200mW, Supplier Part Number 1=BAS40-04TPMSDKR-ND, ComponentLink1Description=https://datasheet.ciiva.com/4716/bas40-bas70sot-23-28891-4716000.pdf?src-supplier=Mouser, ComponentLink1URL=https://datasheet.ciiva.com/4716/bas40-bas70sot-23-28891-4716000.pdf?src-supplier=Mouser, ComponentLink2Description=https://datasheet.ciiva.com/23684/1684803-23684306.pdf?src-supplier=Newark, ComponentLink2URL=https://datasheet.ciiva.com/23684/1684803-23684306.pdf?src-supplier=Newark, ComponentLink3Description=https://datasheet.ciiva.com/906/bas40-bas70sot-23-906318.pdf?src-supplier=Digi-Key, ComponentLink3URL=https://datasheet.ciiva.com/906/bas40-bas70sot-23-906318.pdf?src-supplier=Digi-Key, ComponentLink4Description=https://datasheet.ciiva.com/906/bas40-bas70sot-23-906319.pdf?src-supplier=Digi-Key, ComponentLink4URL=https://datasheet.ciiva.com/906/bas40-bas70sot-23-906319.pdf?src-supplier=Digi-Key, ComponentLink5Description=https://datasheet.ciiva.com/906/bas40-bas70sot-23-906320.pdf?src-supplier=Digi-Key, ComponentLink5URL=https://datasheet.ciiva.com/906/bas40-bas70sot-23-906320.pdf?src-supplier=Digi-Key, ComponentLink6Description=https://datasheet.ciiva.com/7624/1684803-7624699.pdf?src-supplier=Element14, ComponentLink6URL=https://datasheet.ciiva.com/7624/1684803-7624699.pdf?src-supplier=Element14, ComponentLink7Description=https://datasheet.ciiva.com/15200/getdatasheetpartid-226544-15200426.pdf?src-supplier=Verical, ComponentLink7URL=https://datasheet.ciiva.com/15200/getdatasheetpartid-226544-15200426.pdf?src-supplier=Verical, Element Configuration=Single, Forward Current=200mA, Height=1.02mm, Lead Free="Lead Free", Length=3.04mm, Manufacturer Part Number 1=BAS40-04-TP, Max Reverse Leakage Current=200nA, Max Reverse Voltage (DC)=40V, Max Surge Current=600mA, Mount="Surface Mount", Number of Pins=3, Packaging="Tape and Reel", Peak Non-Repetitive Surge Current=600mA, Pricing 1="1=0,26000, 10=0,21300, 100=0,11290, 500=0,07424, 1000=0,05049 (USD)", Radiation Hardening=No, REACH SVHC=Unknown, Recovery Time=5ns, Reverse Recovery Time=5ns, RoHS=Yes, RoHS Compliant=Yes, Series=-, Stock 1=0, Supplier 1=Digi-Key, Width=1.4mm
D3: "SMD LED red 2.4 V 0805, 150080RS75000, Würth Elektronik", Case/Package=0805, Case Code (Metric)=2012, Color=Red, Forward Current=30mA, Forward Voltage=2V, Manufacturer 1="Wurth Electronics", Max Operating Temperature=85°C, Min Operating Temperature=-40°C, Package Quantity=4000, Supplier Part Number 1=732-4984-1-ND, Test Current=20mA, Case Code (Imperial)=0805, ComponentLink1Description=https://datasheet.ciiva.com/22656/150080rs75000-22656961.pdf?src-supplier=Element14, ComponentLink1URL=https://datasheet.ciiva.com/22656/150080rs75000-22656961.pdf?src-supplier=Element14, ComponentLink2Description=https://datasheet.ciiva.com/29279/759435-da-01-en-chipled-0805-w-kl-rot-150080rs75000-29279032.pdf?src-supplier=Conrad, ComponentLink2URL=https://datasheet.ciiva.com/29279/759435-da-01-en-chipled-0805-w-kl-rot-150080rs75000-29279032.pdf?src-supplier=Conrad, Dominant Wavelength=625nm, Height=0.7mm, Length=2mm, Lens Style=Clear,Rectangular, Luminous Intensity=150mcd, Manufacturer Part Number 1=150080RS75000, Mount="Surface Mount", Packaging="Tape and Reel", Pricing 1="1=0,18000, 50=0,17100, 100=0,14700, 500=0,12700 (USD)", REACH SVHC=Unknown, RoHS=Yes, RoHS Compliant=Yes, Stock 1=26828, Supplier 1=Digi-Key, Viewing Angle=140°, Wavelength=625nm, Width=1.25mm
D4 D5: "PANASONIC - DB2J20900L - Schottky Rectifier, 20 V, 500 mA, Single, SOD-323F, 2 Pins, 500 mV", Average Rectified Current=500mA, Forward Voltage=500mV, Manufacturer 1="Panasonic SSG", Max Forward Surge Current (Ifsm)=3A, Max Operating Temperature=125°C, Max Repetitive Reverse Voltage (Vrrm)=20V, Max Reverse Current=30uA, Min Operating Temperature=-55°C, Package Quantity=1, Supplier Part Number 1=70358466, ComponentLink1Description=https://datasheet.ciiva.com/7964/db2j209-bed-7964194.pdf?src-supplier=Element14, ComponentLink1URL=https://datasheet.ciiva.com/7964/db2j209-bed-7964194.pdf?src-supplier=Element14, ComponentLink2Description=https://datasheet.ciiva.com/22650/db2j209-bed-22650026.pdf?src-supplier=Farnell, ComponentLink2URL=https://datasheet.ciiva.com/22650/db2j209-bed-22650026.pdf?src-supplier=Farnell, ComponentLink3Description=https://datasheet.ciiva.com/22659/1912053-22659242.pdf?src-supplier=Element14, ComponentLink3URL=https://datasheet.ciiva.com/22659/1912053-22659242.pdf?src-supplier=Element14, Contact Plating=Tin, Element Configuration=Single, Forward Current=500mA, Height=0.7mm, Lead Free="Lead Free", Length=1.7mm, Manufacturer Part Number 1=DB2J20900L, Max Reverse Voltage (DC)=20V, Mount="Surface Mount", Number of Pins=2, Packaging="Tape and Reel", Peak Non-Repetitive Surge Current=3A, Pricing 1="1=0,17400, 100=0,16600, 200=0,15100, 400=0,13600, 1000=0,12100 (USD)", REACH SVHC=Unknown, Reverse Recovery Time=2.4ns, RoHS=Yes, RoHS Compliant=Yes, Stock 1=0, Supplier 1="Allied Electronics", Width=1.25mm
D6: "LED GREEN CLEAR 0805 SMD", Case/Package=0805, Case Code (Metric)=2012, Color=Green, Forward Current=30mA, Forward Voltage=2V, Manufacturer 1="Wurth Electronics", Max Operating Temperature=85°C, Min Operating Temperature=-40°C, Package Quantity=4000, Supplier Part Number 1=8154237P, Test Current=20mA, Case Code (Imperial)=0805, ComponentLink1Description=https://datasheet.ciiva.com/22656/150080vs75000-22656966.pdf?src-supplier=Element14, ComponentLink1URL=https://datasheet.ciiva.com/22656/150080vs75000-22656966.pdf?src-supplier=Element14, ComponentLink2Description=https://datasheet.ciiva.com/29279/759437-da-01-en-chipled-0805-w-kl-h-gruen-150080vs7500-29279047.pdf?src-supplier=Conrad, ComponentLink2URL=https://datasheet.ciiva.com/29279/759437-da-01-en-chipled-0805-w-kl-h-gruen-150080vs7500-29279047.pdf?src-supplier=Conrad, ComponentLink3Description=https://datasheet.ciiva.com/29563/150080vs75000-29563018.pdf?src-supplier=Digi-Key, ComponentLink3URL=https://datasheet.ciiva.com/29563/150080vs75000-29563018.pdf?src-supplier=Digi-Key, Dominant Wavelength=570nm, Height=0.7mm, Length=2mm, Lens Style=Clear,Rectangular, Luminous Intensity=40mcd, Manufacturer Part Number 1=150080VS75000, Mount="Surface Mount", Packaging="Tape and Reel", Pricing 1="500=0,09600, 1000=0,09200, 2000=0,08700, 4000=0,08300 (GBP)", REACH SVHC=Unknown, RoHS=Yes, Stock 1=13900, Supplier 1=RSComponents, Viewing Angle=140°, Wavelength=570nm, Width=1.25mm
D7: "LED YELLOW CLEAR 0805 SMD", Case/Package=0805, Case Code (Metric)=2012, Color=Yellow, Forward Current=30mA, Forward Voltage=2V, Manufacturer 1="Wurth Electronics", Max Operating Temperature=85°C, Min Operating Temperature=-40°C, Package Quantity=4000, Supplier Part Number 1=8154231P, Test Current=20mA, Case Code (Imperial)=0805, ComponentLink1Description=https://datasheet.ciiva.com/23843/150080ys75000-23843256.pdf?src-supplier=Newark, ComponentLink1URL=https://datasheet.ciiva.com/23843/150080ys75000-23843256.pdf?src-supplier=Newark, ComponentLink2Description=https://datasheet.ciiva.com/29279/759438-da-01-en-chipled-0805-w-kl-gelb-150080ys75000-29279034.pdf?src-supplier=Conrad, ComponentLink2URL=https://datasheet.ciiva.com/29279/759438-da-01-en-chipled-0805-w-kl-gelb-150080ys75000-29279034.pdf?src-supplier=Conrad, ComponentLink3Description=https://datasheet.ciiva.com/29563/150080ys75000-29563019.pdf?src-supplier=Digi-Key, ComponentLink3URL=https://datasheet.ciiva.com/29563/150080ys75000-29563019.pdf?src-supplier=Digi-Key, ComponentLink4Description=https://datasheet.ciiva.com/29563/150080ys75000-29563020.pdf?src-supplier=Digi-Key, ComponentLink4URL=https://datasheet.ciiva.com/29563/150080ys75000-29563020.pdf?src-supplier=Digi-Key, ComponentLink5Description=https://datasheet.ciiva.com/29563/150080ys75000-29563021.pdf?src-supplier=Digi-Key, ComponentLink5URL=https://datasheet.ciiva.com/29563/150080ys75000-29563021.pdf?src-supplier=Digi-Key, ComponentLink6Description=https://datasheet.ciiva.com/22656/1911353-22656971.pdf?src-supplier=Element14, ComponentLink6URL=https://datasheet.ciiva.com/22656/1911353-22656971.pdf?src-supplier=Element14, Dominant Wavelength=590nm, Height=0.7mm, Length=2mm, Lens Style=Clear,Rectangular, Luminous Intensity=120mcd, Manufacturer Part Number 1=150080YS75000, Mount="Surface Mount", Packaging="Tape and Reel", Pricing 1="500=0,09600, 750=0,09200, 1500=0,08700, 3000=0,08300 (GBP)", REACH SVHC=Unknown, RoHS=Yes, RoHS Compliant=Yes, Stock 1=9250, Supplier 1=RSComponents, Viewing Angle=140°, Wavelength=590nm, Width=1.25mm
L1: "Ind General Purpose Chip Wirewound 10uH 10% 2.52MHz 50Q-Factor Ferrite 250mA 1812 T/R", Case/Package=1812, Case Code (Metric)=4532, Current=160mA, Current Rating=250mA, DC Resistance (DCR)=1.6R, Inductance=10uH, Inductance Tolerance=10%, Manufacturer 1=Bourns, Max Operating Temperature=100°C, Min Operating Temperature=-40°C, Package Quantity=500, Resistor Type=Wirewound, Self Resonant Frequency=20MHz, Supplier Part Number 1=CM453232-100KLCT-ND, Test Frequency=2.52MHz, Case Code (Imperial)=1812, ComponentLink1Description=https://datasheet.ciiva.com/27049/774461-27049974.pdf?src-supplier=Jameco, ComponentLink1URL=https://datasheet.ciiva.com/27049/774461-27049974.pdf?src-supplier=Jameco, ComponentLink2Description=https://datasheet.ciiva.com/11799/0900766b81218b74-11799714.pdf?src-supplier=RSComponents, ComponentLink2URL=https://datasheet.ciiva.com/11799/0900766b81218b74-11799714.pdf?src-supplier=RSComponents, ComponentLink3Description=https://datasheet.ciiva.com/29348/447189-da-01-en-induktivitaet-cm453232-100kl-10uh-250ma-29348045.pdf?src-supplier=Conrad, ComponentLink3URL=https://datasheet.ciiva.com/29348/447189-da-01-en-induktivitaet-cm453232-100kl-10uh-250ma-29348045.pdf?src-supplier=Conrad, ComponentLink4Description=https://datasheet.ciiva.com/3081/cm-3081727.pdf?src-supplier=Avnet, ComponentLink4URL=https://datasheet.ciiva.com/3081/cm-3081727.pdf?src-supplier=Avnet, ComponentLink5Description=https://datasheet.ciiva.com/6689/cm-6689143.pdf?src-supplier=Digi-Key, ComponentLink5URL=https://datasheet.ciiva.com/6689/cm-6689143.pdf?src-supplier=Digi-Key, ComponentLink6Description=https://datasheet.ciiva.com/6689/cm-6689144.pdf?src-supplier=Digi-Key, ComponentLink6URL=https://datasheet.ciiva.com/6689/cm-6689144.pdf?src-supplier=Digi-Key, ComponentLink7Description=https://datasheet.ciiva.com/6689/cm-6689145.pdf?src-supplier=Digi-Key, ComponentLink7URL=https://datasheet.ciiva.com/6689/cm-6689145.pdf?src-supplier=Digi-Key, ComponentLink8Description=https://datasheet.ciiva.com/4978/cm-4978555.pdf?src-supplier=Mouser, ComponentLink8URL=https://datasheet.ciiva.com/4978/cm-4978555.pdf?src-supplier=Mouser, ComponentLink9Description=https://datasheet.ciiva.com/25903/cm-25903528.pdf?src-supplier=Avnet+Europe, ComponentLink9URL=https://datasheet.ciiva.com/25903/cm-25903528.pdf?src-supplier=Avnet+Europe, ComponentLink10Description=https://datasheet.ciiva.com/14124/wfcm-dat-e-14124666.pdf?src-supplier=Distrelec, ComponentLink10URL=https://datasheet.ciiva.com/14124/wfcm-dat-e-14124666.pdf?src-supplier=Distrelec, ComponentLink11Description=https://datasheet.ciiva.com/15225/getdatasheetpartid-128072-15225413.pdf?src-supplier=Verical, ComponentLink11URL=https://datasheet.ciiva.com/15225/getdatasheetpartid-128072-15225413.pdf?src-supplier=Verical, ComponentLink12Description=https://datasheet.ciiva.com/7839/1481743-7839005.pdf?src-supplier=Element14, ComponentLink12URL=https://datasheet.ciiva.com/7839/1481743-7839005.pdf?src-supplier=Element14, ComponentLink13Description=https://datasheet.ciiva.com/7839/1481743-7839006.pdf?src-supplier=Element14, ComponentLink13URL=https://datasheet.ciiva.com/7839/1481743-7839006.pdf?src-supplier=Element14, Contact Plating=Tin, Core Material=Ferrite, DC Current=250mA, Depth=3.4mm, Height=3mm, Height - Seated (Max)=0.134inch, Length=4.8mm, Manufacturer Part Number 1=CM453232-100KL, Max DC Current=250mA, Military Standard=Not, Mount="Surface Mount", Number of Pins=2, Packaging="Tape and Reel", Pricing 1="1=0,43000, 10=0,38100, 25=0,33320, 50=0,28540, 100=0,26170, 250=0,23788 (USD)", Q Factor=50, Radiation Hardening=No, REACH SVHC="No SVHC", RoHS=Yes, RoHS Compliant=Yes, Series=CM453232, Series Resistance=1.6R, Shielding=Unshielded, Stock 1=1374, Supplier 1=Digi-Key, Termination=SMD/SMT, Tolerance=10%, Width=0.126inch
Q1 Q2: "Trans GP BJT NPN 40V 0.6A 3-Pin SOT-23 T/R", Case/Package=SOT-23-3, Collector-emitter Voltage-Max=1V, Collector Base Voltage (VCBO)=75V, Collector Emitter Breakdown Voltage=40V, Current Rating=600mA, Emitter Base Voltage (VEBO)=6V, Frequency=300MHz, Manufacturer 1="ON Semiconductor", Max Operating Temperature=150°C, Max Power Dissipation=300mW, Min Operating Temperature=-55°C, Package Quantity=1, Supplier Part Number 1=MMBT2222ALT1GOSCT-ND, Collector Emitter Saturation Voltage=1V, Collector Emitter Voltage (VCEO)=40V, ComponentLink1Description=https://datasheet.ciiva.com/16199/mmbt2222lt1-d-16199072.pdf?src-supplier=Future+Electronics, ComponentLink1URL=https://datasheet.ciiva.com/16199/mmbt2222lt1-d-16199072.pdf?src-supplier=Future+Electronics, ComponentLink2Description=https://datasheet.ciiva.com/15139/getdatasheetpartid-82691-15139077.pdf?src-supplier=Verical, ComponentLink2URL=https://datasheet.ciiva.com/15139/getdatasheetpartid-82691-15139077.pdf?src-supplier=Verical, ComponentLink3Description=https://datasheet.ciiva.com/976/mmbt2222lt1-d-976344.pdf?src-supplier=Digi-Key, ComponentLink3URL=https://datasheet.ciiva.com/976/mmbt2222lt1-d-976344.pdf?src-supplier=Digi-Key, ComponentLink4Description=https://datasheet.ciiva.com/976/mmbt2222lt1-d-976345.pdf?src-supplier=Digi-Key, ComponentLink4URL=https://datasheet.ciiva.com/976/mmbt2222lt1-d-976345.pdf?src-supplier=Digi-Key, ComponentLink5Description=https://datasheet.ciiva.com/976/mmbt2222lt1-d-976346.pdf?src-supplier=Digi-Key, ComponentLink5URL=https://datasheet.ciiva.com/976/mmbt2222lt1-d-976346.pdf?src-supplier=Digi-Key, ComponentLink6Description=https://datasheet.ciiva.com/11201/mmbt2222lt1-d-11201869.pdf?src-supplier=Avnet, ComponentLink6URL=https://datasheet.ciiva.com/11201/mmbt2222lt1-d-11201869.pdf?src-supplier=Avnet, ComponentLink7Description=https://datasheet.ciiva.com/25998/mmbt2222lt1-d-25998815.pdf?src-supplier=Avnet+Europe, ComponentLink7URL=https://datasheet.ciiva.com/25998/mmbt2222lt1-d-25998815.pdf?src-supplier=Avnet+Europe, ComponentLink8Description=https://datasheet.ciiva.com/7972/mmbt2222lt1-d-7972057.pdf?src-supplier=Element14, ComponentLink8URL=https://datasheet.ciiva.com/7972/mmbt2222lt1-d-7972057.pdf?src-supplier=Element14, ComponentLink9Description=https://datasheet.ciiva.com/7972/mmbt2222lt1-d-7972058.pdf?src-supplier=Element14, ComponentLink9URL=https://datasheet.ciiva.com/7972/mmbt2222lt1-d-7972058.pdf?src-supplier=Element14, ComponentLink10Description=https://datasheet.ciiva.com/14546/70099528-14546715.pdf?src-supplier=Allied+Electronics, ComponentLink10URL=https://datasheet.ciiva.com/14546/70099528-14546715.pdf?src-supplier=Allied+Electronics, Contact Plating=Tin,Matte, Element Configuration=Single, Gain Bandwidth Product=300MHz, Height=0.94mm, hFE Min=100, Lead Free="Lead Free", Length=2.9mm, Manufacturer Part Number 1=MMBT2222ALT1G, Max Breakdown Voltage=40V, Max Collector Current=600mA, Max Frequency=300MHz, Number of Elements=1, Number of Pins=3, Packaging="Tape and Reel", Polarity=NPN, Power Dissipation=300mW, Pricing 1="1=0,16000, 10=0,14800, 100=0,08030, 500=0,04944, 1000=0,03371 (USD)", Radiation Hardening=No, REACH SVHC="No SVHC", RoHS=Yes, Series=-, Stock 1=0, Supplier 1=Digi-Key, Transition Frequency=300MHz, Type="General Purpose", Voltage Rating (DC)=40V, Width=1.3mm